# Altium PCB addon.PcbDoc
Units mil, origin at the board's own origin, x right, y up, seen from the top; angles counter-clockwise.
Board outline 6000 x 4000 mil, 2 copper layers (Top Layer, Bottom Layer); 2 components, 85 nets, 36 pads, 0 vias.
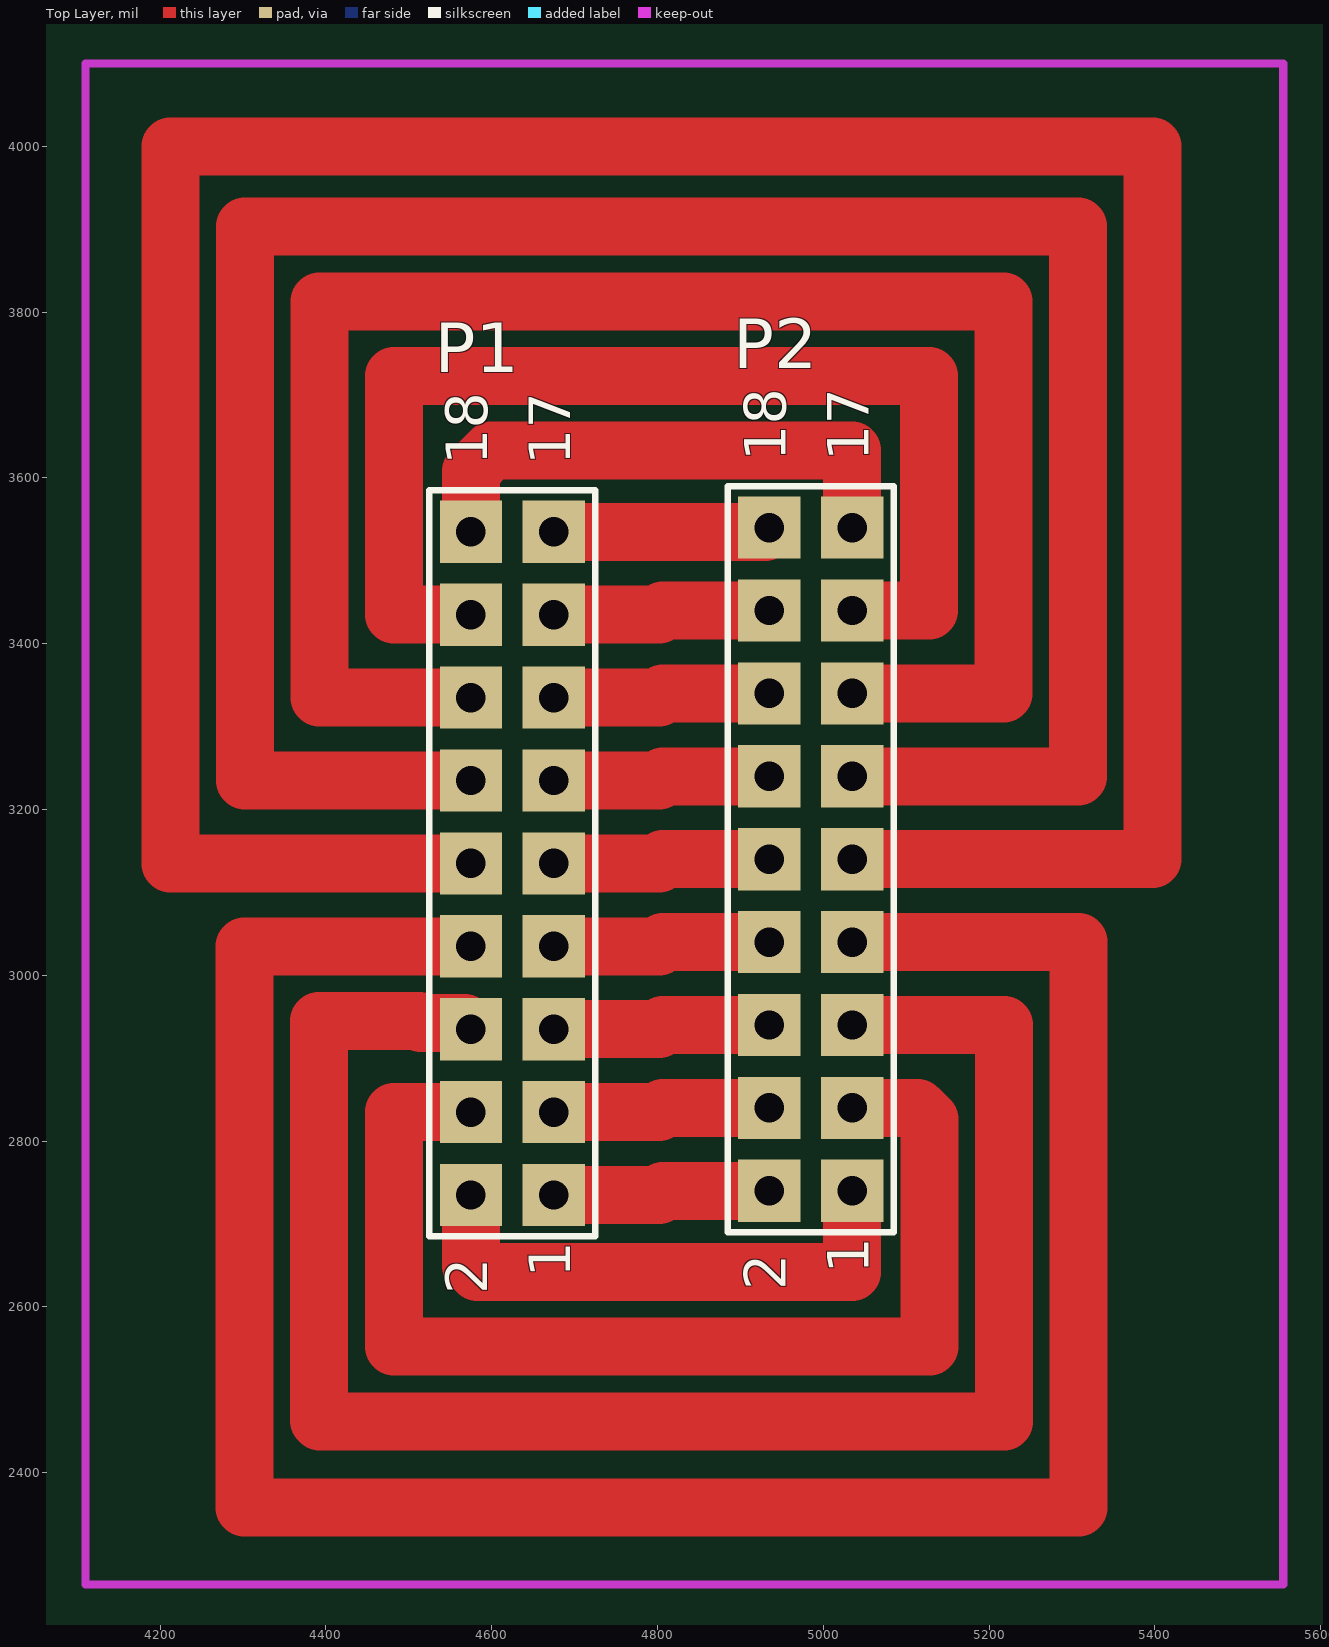
[diagram p0: Top Layer view]
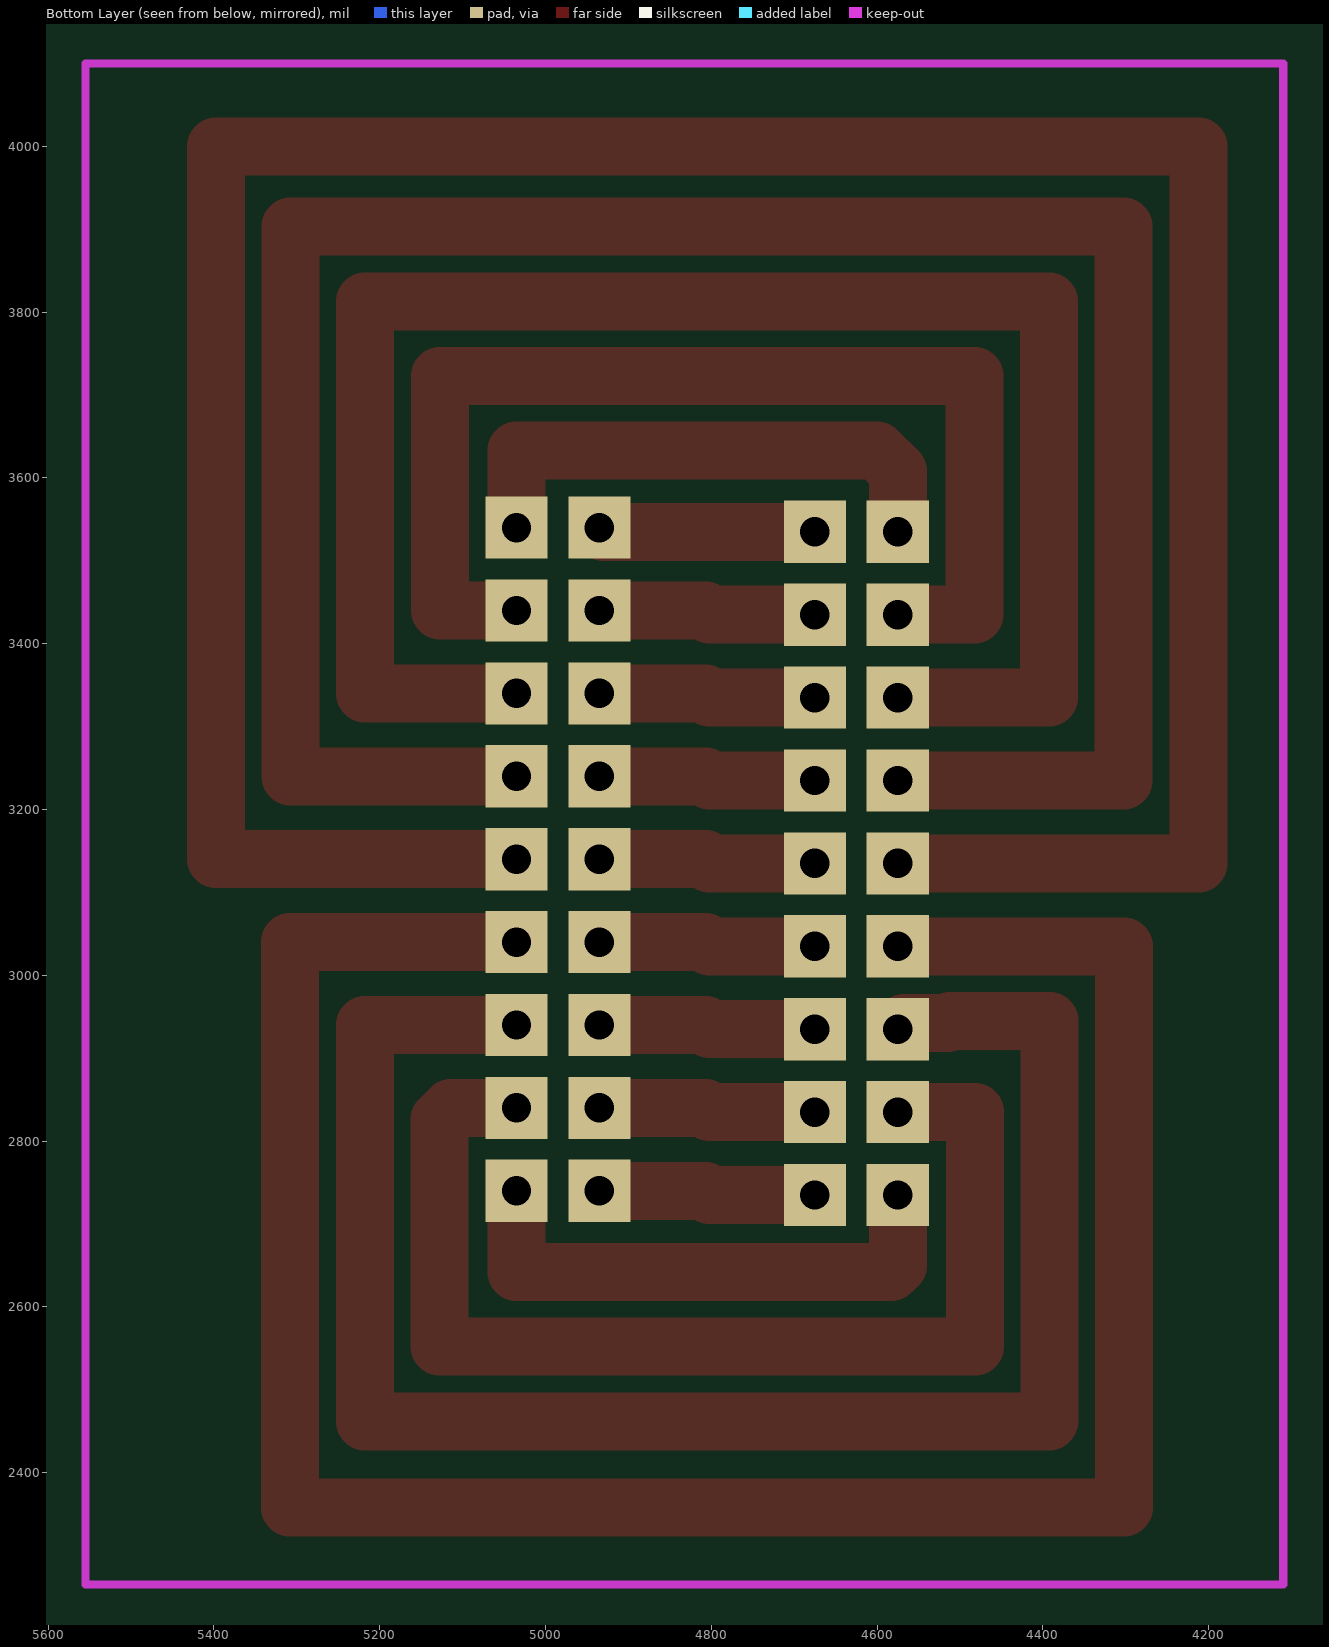
[diagram p1: Bottom Layer view, seen from below]

## Layer stack, top to bottom
Top Solder: solder mask 0.4, Solder Resist, Dk 3.5
Top Layer: signal copper 1.4
Dielectric 1: dielectric 12.6, FR-4, Dk 4.8
Bottom Layer: signal copper 1.4
Bottom Solder: solder mask 0.4, Solder Resist, Dk 3.5

## Board outline
1000,1000 7000,1000 7000,5000 1000,5000

## Design rules (kind name [scope] priority, off if disabled: settings)
Clearance [All] p1: gap=20 ignorepadtopadclearanceinfootprint=FALSE except(0: Arc-Hole Track-Hole SMDPad-Hole THPad-Hole Via-Hole Fill-Hole Poly-Hole Region-Hole Text-Hole)
PolygonConnect [All] p1: connectstyle=Relief reliefconductorwidth=10 reliefentries=4 polygonreliefangle="90 Angle" airgapwidth=10
RoutingLayers [All] p1: top layer_v5=TRUE bottom layer_v5=FALSE
RoutingVias [All] p1: holewidth=28 width=50 viastyle="Through Hole" minholewidth=28 minwidth=50 maxholewidth=28 maxwidth=50
SolderMaskExpansion [All] p1: expansion=4
Width [All] p1: maxlimit=1000 minlimit=10 preferedwidth=100 toplayer_prefwidth=70 minimp=50.000000 maximp=50.000000 favimp=50.000000
29 further rules are at their usual default settings.

## Components (designator, comment, footprint, x,y, rotation, side; value= is the part's Value field where it differs from the comment)
P1 "Header 9X2" HDR2X9 4675,2735 r90 top
P2 "Header 9X2" HDR2X9 5035,2740 r90 top

## Footprints (in the part's own frame and the unit in brackets; to place one, negate y for a bottom-side part, rotate by r counter-clockwise, add the part's x,y. Pads: shape width x height; smd on the part's side, far side on the other; paste and mask are expansions set on the pad)
HDR2X9 [mm] "Connector; Header; 9x2 Position"
  rect 1.905x1.905 hole 0.9: 1(0,0) 2(0,2.54) 3(2.54,0) 4(2.54,2.54) 5(5.08,0) 6(5.08,2.54) 7(7.62,0) 8(7.62,2.54) 9(10.16,0) 10(10.16,2.54) 11(12.7,0) 12(12.7,2.54) 13(15.24,0) 14(15.24,2.54) 15(17.78,0) 16(17.78,2.54) 17(20.32,0) 18(20.32,2.54)
  silkscreen extent -1.27,-1.27 21.59,3.81

## Part data
P1 P2: "Header, 9-Pin, Dual row", LatestRevisionDate=17-Jul-2002, LatestRevisionNote="Re-released for DXP Platform.", Publisher="Altium Limited"

## Nets (pads, with @x,y where several pads share a name; then routed paths per layer and width w, separated by ;. In a path a pad name is that pad's centre, name@x,y a point inside that pad or via, vN(x,y) a via of type N, cw(c..) or ccw(c..) an arc to the next point about the centre after c; other vN are vias at no path point)
3V3: 
5: 
5F: 
GND: 
NetBTN7971B1_2: 
NetBTN7971B1_3: 
NetBTN7971B1_4: 
NetBTN7971B1_5: 
NetBTN7971B1_6: 
NetBTN7971B2_2: 
NetBTN7971B2_4: 
NetBTN7971B2_5: 
NetBTN7971B2_6: 
NetCboot3_1: 
NetCboot3_2: 
NetCboot5_1: 
NetCboot5_2: 
NetCboot5F_1: 
NetCboot5F_2: 
NetCcomp3_2: 
NetCcomp5_2: 
NetCcomp5F_2: 
NetCcomp23_2: 
NetCcomp25_2: 
NetCcomp25F_2: 
NetCss3_2: 
NetCss5_2: 
NetCss5F_2: 
NetHCT244_2: 
NetHCT244_3: 
NetHCT244_4: 
NetHCT244_6: 
NetHCT244_7: 
NetHCT244_8: 
NetHCT244_9: 
NetHCT244_11: 
NetHCT244_12: 
NetHCT244_13: 
NetHCT244_14: 
NetHCT244_15: 
NetHCT244_17: 
NetP1_1: P1.1 P2.2 | length 262.1
  Top Layer w70: P1.1 4802,2735 4807,2740 P2.2
NetP1_2: P1.2 P2.1 | length 646.3
  Top Layer w70: P1.2 4575,2650 4583,2642 5035,2642 P2.1
NetP1_3: P1.3 P2.4 | length 262.1
  Top Layer w70: P1.3 4802,2835 4807,2840 P2.4
NetP1_4: P1.4 P2.3 | length 1394.8
  Top Layer w70: P1.4 4482,2835 4482,2552 5128,2552 5128,2826 5114,2840 P2.3
NetP1_5: P1.5 P2.6 | length 262.1
  Top Layer w70: P1.5 4802,2935 4807,2940 P2.6
NetP1_6: P1.6 P2.5 | length 2156.7
  Top Layer w70: P1.6 4567.5,2942.5 4514.72,2942.5 4512.22,2945 4392,2945 4392,2462.8 4392.8,2462 5218,2462 5218,2940 P2.5
NetP1_7: P1.7 P2.8 | length 262.1
  Top Layer w70: P1.7 4802,3035 4807,3040 P2.8
NetP1_8: P1.8 P2.7 | length 2911
  Top Layer w70: P1.8 4302,3035 4302,2358 5308,2358 5308,3040 P2.7
NetP1_9: P1.9 P2.10 | length 262.1
  Top Layer w70: P1.9 4802,3135 4807,3140 P2.10
NetP1_10: P1.10 P2.9 | length 3630
  Top Layer w70: 4212.5,3135 P1.10 ; 4212.5,3140 4212.5,4000 5397.5,4000 5397.5,3140 P2.9
NetP1_11: P1.11 P2.12 | length 262.1
  Top Layer w70: P1.11 4802,3235 4807,3240 P2.12
NetP1_12: P1.12 P2.11 | length 2881
  Top Layer w70: P1.12 4302.5,3235 4302.5,3903 5307.5,3903 5307.5,3240 P2.11
NetP1_13: P1.13 P2.14 | length 262.1
  Top Layer w70: P1.13 4802,3335 4807,3340 P2.14
NetP1_14: P1.14 P2.13 | length 2141
  Top Layer w70: P1.14 4392.5,3335 4392.5,3813 5217.5,3813 5217.5,3340 P2.13
NetP1_15: P1.15 P2.16 | length 262.1
  Top Layer w70: P1.15 4802,3435 4807,3440 P2.16
NetP1_16: P1.16 P2.15 | length 1401
  Top Layer w70: P1.16 4482.5,3435 4482.5,3723 5127.5,3723 5127.5,3440 P2.15
NetP1_17: P1.17 P2.18 | length 262.1
  Top Layer w70: P1.17 4930,3535 P2.18
NetP1_18: P1.18 P2.17 | length 636.4
  Top Layer w70: P1.18 4575,3608 4600,3633 5035,3633 P2.17
NetPOVin_3: 
NetPOVin_4: 
NetPOVin_5: 
NetPOVin_6: 
NetPOVin_7: 
NetPOVin_8: 
NetPOVin_9: 
NetPOVin_10: 
NetPOVin_11: 
NetPOVin_12: 
NetPOVin_13: 
NetPOVin_14: 
NetPOVin_15: 
NetPOVin_16: 
NetPOVin_17: 
NetPOVin_18: 
NetRenB3_2: 
NetRenB5_2: 
NetRenB5F_2: 
NetRfbb3_2: 
NetRfbb5_2: 
NetRfbb5F_2: 
NetRt3_2: 
NetRt5_2: 
NetRt5F_2: 
VCC: 

## Keep-outs
Keep-Out Layer:
  lines w10: 4110,2265 5555,2265 5555,4100 4110,4100 4110,2265

## Text inside footprints (layer, text, board x,y; h text height)
P1: Top Overlay "18" at 4595,3615 h50 r90; Top Overlay "17" at 4695,3615 h50 r90; Top Overlay "1" at 4695,2635 h50 r90; Top Overlay "2" at 4595,2615 h50 r90
P2: Top Overlay "18" at 4955,3620 h50 r90; Top Overlay "17" at 5055,3620 h50 r90; Top Overlay "1" at 5055,2640 h50 r90; Top Overlay "2" at 4955,2620 h50 r90